# Altium PCB Control_Board_Model_C201_FFC_Sens_Conn.PcbDoc (part 5 of 12)
Units mil, origin at the board's own origin, x right, y up, seen from the top; angles counter-clockwise.
Board outline 3937.01 x 2755.91 mil, 6 copper layers (1-SIG-TOP, 2-GND, 3-PWR, 4-SIG-HOR, 5-SIG-VERT, 6-GND-BOT), stack 46.063 mil thick; 497 components, 379 nets, 1804 pads, 1610 vias.
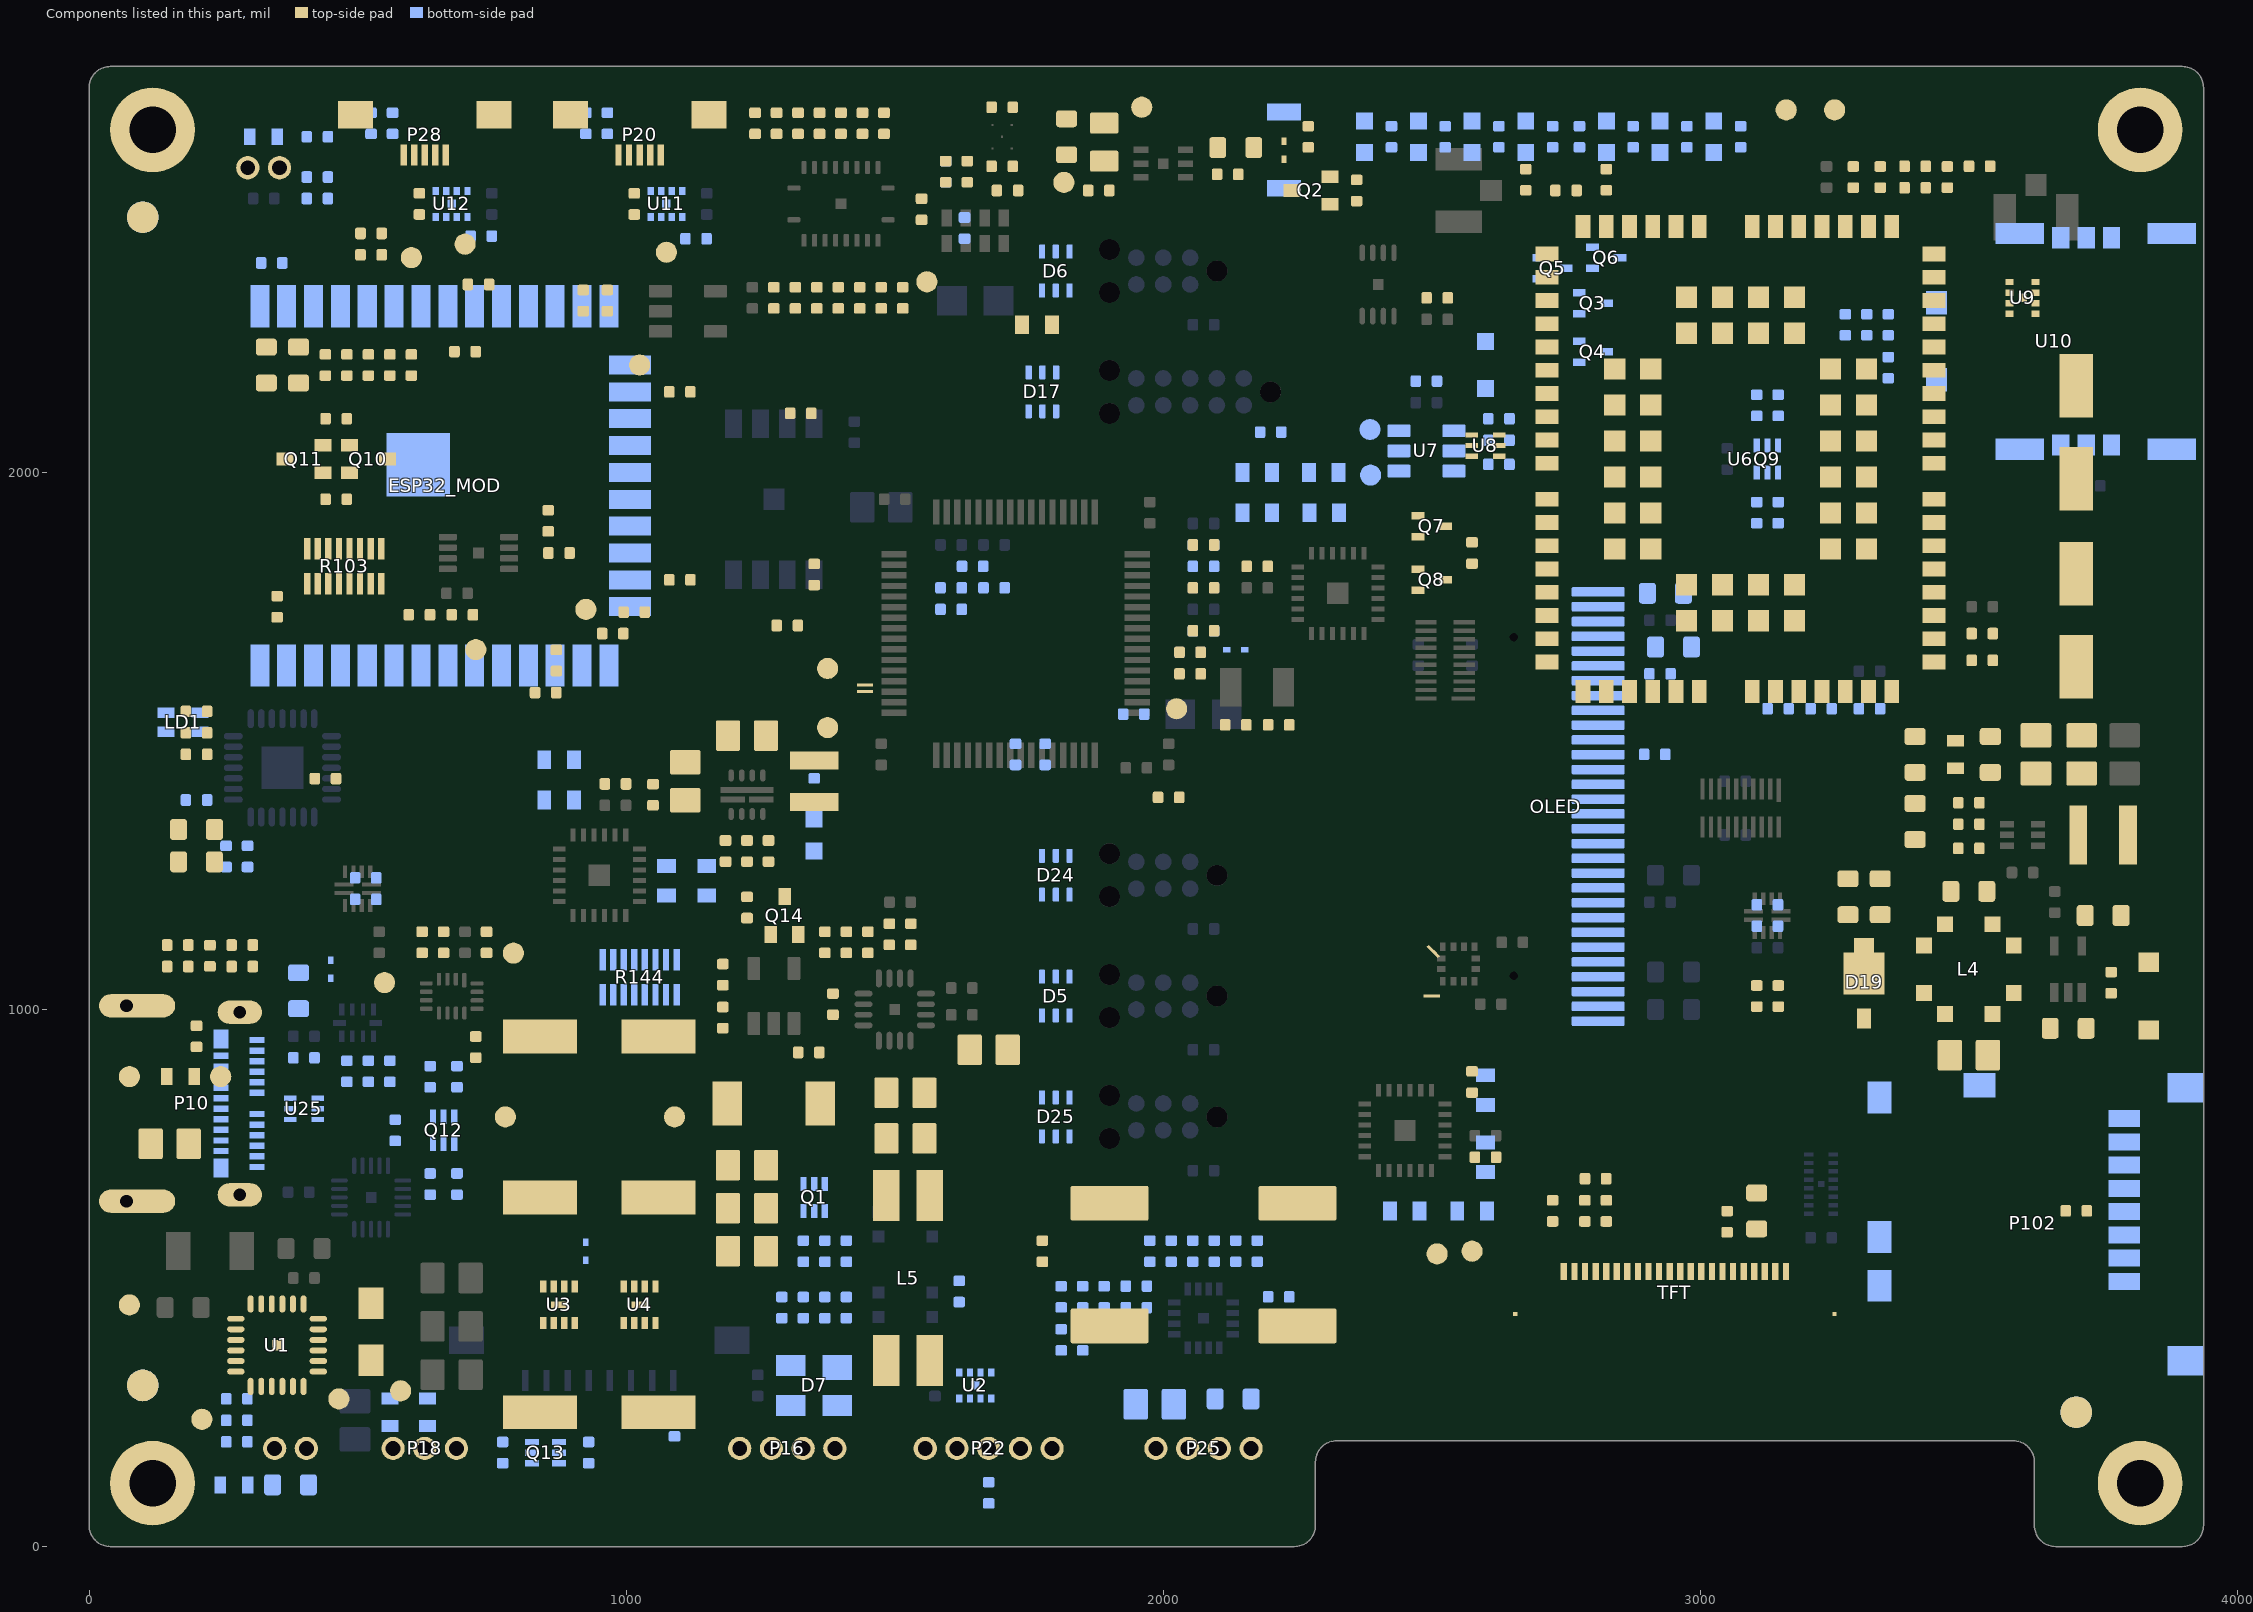
[diagram p7: the components of this part, seen from the top]

## Part data (continued)
D13: "Red 631nm LED Indication - Discrete 2V 0603 (1608 Metric)", Case/Package=0603, Case Code (Metric)=1608, Color=Red, Forward Current=30mA, Forward Voltage=2V, Lens Color=Colorless, Manufacturer="Vishay Lite-On", Manufacturer Part Number=LTST-C191KRKT, Max Operating Temperature=85°C, Min Operating Temperature=-55°C, Package Quantity=1, Power Dissipation=75mW, Reverse Voltage=5V, Supplier Part Number 1=160-1447-1-ND, Test Current=20mA, Case Code (Imperial)=0603, ComponentLink1Description=http://optoelectronics.liteon.com/upload/download/DS22-2000-223/LTST-C191KRKT.PDF?src-supplier=Digi-Key, ComponentLink1URL=http://optoelectronics.liteon.com/upload/download/DS22-2000-223/LTST-C191KRKT.PDF?src-supplier=Digi-Key, ComponentLink2Description=http://www1.futureelectronics.com/doc/LITE-ON/LTST-C191KRKT.pdf?src-supplier=Future+Electronics, ComponentLink2URL=http://www1.futureelectronics.com/doc/LITE-ON/LTST-C191KRKT.pdf?src-supplier=Future+Electronics, ComponentLink3Description=https://www.verical.com/server-webapp/html/getDatasheet?partID=141922&src-supplier=Verical, ComponentLink3URL=https://www.verical.com/server-webapp/html/getDatasheet?partID=141922&src-supplier=Verical, ComponentLink4Description=http://www.mouser.com/ds/2/239/LTST-C191KRKT-1140668.pdf?src-supplier=Mouser, ComponentLink4URL=http://www.mouser.com/ds/2/239/LTST-C191KRKT-1140668.pdf?src-supplier=Mouser, Depth=0.8mm, Dominant Wavelength=631nm, Height=0.55mm, Illumination Color=Red, Lead Free="Lead Free", Length=1.6mm, Lens Style=Clear,Diffused,Colorless,Rectangular, Lens Transparency=Clear, Luminous Intensity=54mcd, Mount="Surface Mount", Number of Elements=1, Number of LEDs=1, Number of Pins=2, Packaging="Tape and Reel", Power Rating=75mW, Pricing 1="1=0.26, 10=0.192, 100=0.0909, 500=0.0606, 1000=0.0475, 2500=0.0465 (USD)", Radiation Hardening=No, Stock 1=230321, Supplier 1=Digi-Key, Viewing Angle=130°, Voltage=2V, Wavelength=639nm, Width=0.8mm
D14: "Green 571nm LED Indication - Discrete 2V 0603 (1608 Metric)", Case Code (Imperial)=0603, Case Code (Metric)=1608, Forward Current=30mA, Forward Voltage=2V, Illumination Color=Green, Lens Color=Colorless, Manufacturer="Vishay Lite-On", Manufacturer Part Number=LTST-C191KGKT, Max Operating Temperature=85°C, Max Power Dissipation=75mW, Min Operating Temperature=-55°C, Package Quantity=1, Reverse Voltage=5V, Supplier Part Number 1=160-1446-6-ND, Test Current=20mA, ComponentLink1Description=http://optoelectronics.liteon.com/upload/download/DS22-2000-228/LTST-C191KGKT.PDF?src-supplier=Digi-Key, ComponentLink1URL=http://optoelectronics.liteon.com/upload/download/DS22-2000-228/LTST-C191KGKT.PDF?src-supplier=Digi-Key, Depth=0.8mm, Dominant Wavelength=571nm, Height=0.55mm, Lead Free="Lead Free", Length=1.6mm, Lens Style=Rectangular,Colorless, Lens Transparency=Clear, Luminous Intensity=35mcd, Mount="Surface Mount", Number of Elements=1, Number of LEDs=1, Number of Pins=2, Packaging="Tape and Reel", Power Dissipation=75mW, Power Rating=75mW, Pricing 1="1=0.28, 10=0.201, 100=0.0954, 500=0.0636, 1000=0.0498, 2500=0.0488 (USD)", Radiation Hardening=No, Stock 1=788359, Supplier 1=Digi-Key, Viewing Angle=130°, Wavelength=574nm, Width=0.8mm
D15: "Blue 470nm LED Indication - Discrete 3.3V 0603 (1608 Metric)", Case/Package=0603, Case Code (Metric)=1608, Color=Blue, Forward Current=20mA, Forward Voltage=3.8V, Lens Color=Colorless, Manufacturer="Vishay Lite-On", Manufacturer Part Number=LTST-C191TBKT, Max Operating Temperature=80°C, Max Power Dissipation=75mW, Min Operating Temperature=-20°C, Package Quantity=1, Power Dissipation=76mW, Reverse Voltage=5V, Supplier Part Number 1=160-1647-1-ND, Case Code (Imperial)=0603, ComponentLink1Description=http://optoelectronics.liteon.com/upload/download/DS22-2000-230/LTST-C191TBKT.pdf?src-supplier=Digi-Key, ComponentLink1URL=http://optoelectronics.liteon.com/upload/download/DS22-2000-230/LTST-C191TBKT.pdf?src-supplier=Digi-Key, ComponentLink2Description=http://optoelectronics.liteon.com/upload/download/DS22-2000-230/LTST-C191TBKT.pdf?src-supplier=Verical, ComponentLink2URL=http://optoelectronics.liteon.com/upload/download/DS22-2000-230/LTST-C191TBKT.pdf?src-supplier=Verical, ComponentLink3Description=http://optoelectronics.liteon.com/upload/download/DS22-2000-230/LTST-C191TBKT.pdf?src-supplier=Mouser, ComponentLink3URL=http://optoelectronics.liteon.com/upload/download/DS22-2000-230/LTST-C191TBKT.pdf?src-supplier=Mouser, ComponentLink4Description=http://www1.futureelectronics.com/doc/LITE-ON/LTST-C191TBKT.pdf?src-supplier=Future+Electronics, ComponentLink4URL=http://www1.futureelectronics.com/doc/LITE-ON/LTST-C191TBKT.pdf?src-supplier=Future+Electronics, ComponentLink5Description=http://optoelectronics.liteon.com/upload/download/DS22-2000-230/LTST-C191TBKT.pdf?src-supplier=Jameco, ComponentLink5URL=http://optoelectronics.liteon.com/upload/download/DS22-2000-230/LTST-C191TBKT.pdf?src-supplier=Jameco, ComponentLink6Description=http://uk.rs-online.com/webdocs/0dc0/0900766b80dc02b4.pdf?src-supplier=RSComponents, ComponentLink6URL=http://uk.rs-online.com/webdocs/0dc0/0900766b80dc02b4.pdf?src-supplier=RSComponents, ComponentLink7Description=http://datasheet.iiic.cc/lite-on/LTST-C191TBKT.pdf?src-supplier=IIIC, ComponentLink7URL=http://datasheet.iiic.cc/lite-on/LTST-C191TBKT.pdf?src-supplier=IIIC, Depth=1.6mm, Dominant Wavelength=475nm, Height=0.55mm, Illumination Color=Blue, Lead Free="Lead Free", Length=0.8mm, Lens Style=Diffused,Colorless,Clear,Rectangular, Lens Transparency=Clear, Luminous Intensity=180mcd, Mount="Surface Mount", Number of Elements=1, Number of LEDs=1, Number of Pins=2, Packaging="Tape and Reel", Pricing 1="1=0.48, 10=0.342, 100=0.152, 500=0.1064, 1000=0.0874, 2500=0.076 (USD)", Radiation Hardening=No, Stock 1=239244, Supplier 1=Digi-Key, Test Current=20mA, Viewing Angle=130°, Wavelength=468nm, Width=0.8mm
D19: library part "DIODE SCHOTTKY 20V 1A STMITEFLAT", "Diode Schottky 20V 1A Surface Mount STmite Flat", Average Rectified Current=1A, Forward Voltage=440mV, Manufacturer=STMicroelectronics, Max Operating Temperature=150°C, Max Repetitive Reverse Voltage (Vrrm)=20V, Max Reverse Leakage Current=300uA, Max Surge Current=50A, Min Operating Temperature=-65°C, Package Quantity=1, Peak Reverse Current=3.9uA, Supplier Part Number 1=497-12281-1-ND, ComponentLink1Description=http://www.st.com/web/en/resource/technical/document/datasheet/CD00198749.pdf?src-supplier=Future+Electronics, ComponentLink1URL=http://www.st.com/web/en/resource/technical/document/datasheet/CD00198749.pdf?src-supplier=Future+Electronics, ComponentLink2Description=http://www.st.com/content/ccc/resource/technical/document/datasheet/b2/7e/6d/c8/81/31/4e/f2/CD00198749.pdf/files/CD00198749.pdf/jcr:content/translations/en.CD00198749.pdf?src-supplier=Digi-Key, ComponentLink2URL=http://www.st.com/content/ccc/resource/technical/document/datasheet/b2/7e/6d/c8/81/31/4e/f2/CD00198749.pdf/files/CD00198749.pdf/jcr:content/translations/en.CD00198749.pdf?src-supplier=Digi-Key, ComponentLink3Description=http://www.st.com/st-web-ui/static/active/en/resource/technical/document/datasheet/CD00198749.pdf?src-supplier=Mouser, ComponentLink3URL=http://www.st.com/st-web-ui/static/active/en/resource/technical/document/datasheet/CD00198749.pdf?src-supplier=Mouser, Element Configuration=Single, Forward Current=1A, Lead Free="Lead Free", Manufacturer Part Number=STPS120MF, Max Reverse Voltage (DC)=20V, Mount="Surface Mount", Number of Pins=2, Packaging="Tape and Reel", Peak Non-Repetitive Surge Current=50A, Pricing 1="1=0.48, 10=0.409, 100=0.3057, 500=0.2402, 1000=0.1856, 2500=0.1692, 5000=0.1583 (USD)", Radiation Hardening=No, Stock 1=3984, Supplier 1=Digi-Key
D20: library part "DIODE ZENER 3.3V 500MW SOD123", "Zener Diode ±5% Surface Mount SOD-123", Case/Package=SOD-123-2, Forward Voltage=900mV, Manufacturer=Diodes, Max Operating Temperature=150°C, Max Power Dissipation=500mW, Max Reverse Current=25uA, Min Operating Temperature=-65°C, Package Quantity=3000, Supplier Part Number 1=MMSZ5226B-FDICT-ND, Test Current=20mA, Tolerance=5%, Voltage Rating (DC)=3.3V, ComponentLink1Description=http://www.diodes.com/datasheets/ds18010.pdf?src-supplier=Avnet+Europe, ComponentLink1URL=http://www.diodes.com/datasheets/ds18010.pdf?src-supplier=Avnet+Europe, Element Configuration=Single, Height=1.35mm, Impedance=28R, Lead Free="Lead Free", Length=3.85mm, Manufacturer Part Number=MMSZ5226B-7-F, Max Reverse Leakage Current=25uA, Mount="Surface Mount", Number of Pins=2, Packaging="Tape and Reel", Power Dissipation=500mW, Power Rating=500mW, Pricing 1="1=0.19, 10=0.164, 100=0.063, 500=0.046, 1000=0.0309 (USD)", Radiation Hardening=No, Stock 1=63613, Supplier 1=Digi-Key, Termination=SMD/SMT, Voltage Tolerance=5%, Weight=0.000353oz, Width=1.7mm, Working Voltage=3.3V, Zener Current=25uA, Zener Voltage=3.3V
D21: library part "TVS DIODE ESDA25P35-1U1M 22V 41V 1610", "41V Clamp 35A (8/20µs) Ipp Tvs Diode Surface Mount 1610", Case/Package=1610, Clamping Voltage=41V, Manufacturer=STMicroelectronics, Max Operating Temperature=150°C, Min Breakdown Voltage=23.3V, Min Operating Temperature=-55°C, Peak Pulse Current=35A, Peak Pulse Power=1.4kW, Power Line Protection=No, Reverse Standoff Voltage=22V, Supplier Part Number 1=497-16913-1-ND, ComponentLink1Description=http://www.st.com/content/ccc/resource/technical/document/datasheet/group3/e4/43/53/b9/4e/8a/40/bb/DM00312034/files/DM00312034.pdf/jcr:content/translations/en.DM00312034.pdf?src-supplier=Digi-Key, ComponentLink1URL=http://www.st.com/content/ccc/resource/technical/document/datasheet/group3/e4/43/53/b9/4e/8a/40/bb/DM00312034/files/DM00312034.pdf/jcr:content/translations/en.DM00312034.pdf?src-supplier=Digi-Key, ComponentLink2Description=http://www.farnell.com/datasheets/2236209.pdf?src-supplier=Farnell, ComponentLink2URL=http://www.farnell.com/datasheets/2236209.pdf?src-supplier=Farnell, ComponentLink3Description=http://www.farnell.com/datasheets/2236209.pdf?src-supplier=Element14, ComponentLink3URL=http://www.farnell.com/datasheets/2236209.pdf?src-supplier=Element14, ComponentLink4Description=http://www.farnell.com/datasheets/2236209.pdf?src-supplier=Newark, ComponentLink4URL=http://www.farnell.com/datasheets/2236209.pdf?src-supplier=Newark, Composition=Zener, Manufacturer Part Number=ESDA25P35-1U1M, Mount="Surface Mount", Number of Pins=2, Number of Unidirectional Channels=1, Packaging="Tape and Reel", Pricing 1="1=0.45, 10=0.362, 25=0.3312, 100=0.2079, 250=0.2056, 500=0.1925, 1000=0.1309, 2500=0.1255 (USD)", Stock 1=12413, Supplier 1=Digi-Key
D23: library part "DIODE SCHOTTKY 40V 5A SOD128", "Diode Schottky 40V 5A Surface Mount CFP5", If - Forward Current="5 A", Ifsm - Forward Surge Current="70 A", Ir - Reverse Current="300 uA", Manufacturer=Nexperia, Maximum Operating Temperature="+ 150 C", Minimum Operating Temperature="- 55 C", Package / Case=SOD-128-2, Supplier Part Number 1=771-PMEG4050EP115, Vf - Forward Voltage="0.49 V", Vrrm - Repetitive Reverse Voltage="40 V", Brand=Nexperia, Category="Schottky Diodes & Rectifiers", ComponentLink1Description=https://www.mouser.com/datasheet/2/916/PMEG4050EP-1320387.pdf, ComponentLink1URL=https://www.mouser.com/datasheet/2/916/PMEG4050EP-1320387.pdf, Configuration=Single, Height="1.1 mm", Length="4 mm", Manufacturer Part Number=PMEG4050EP,115, Minimum Order Quantity=1, Mount="Surface Mount", Mounting Style=SMD/SMT, Operating Temperature Range="+ 150 C", Packaging="Cut Tape", Pricing 1="1=0.470, 10=0.346, 100=0.216, 1000=0.147, 3000=0.129, 9000=0.116, 24000=0.114, 45000=0.107, 99000=0.104 (USD)", Product="Schottky Diodes", Product Type="Schottky Diodes & Rectifiers", Qualification=AEC-Q101, Reeling=True, RoHS="RoHS Compliant", RoHS - Mouser=Y, Standard Pack Qty=3000, Stock 1=39277, Subcategory="Diodes & Rectifiers", Supplier 1=Mouser, Technology=Si, Type="Schottky Diode", Width="2.7 mm"
ESP32_MOD: library part "MOD ESP32-WROOM-32D TRACE ANT SMD", "Bluetooth, WiFi 802.11b/g/n, Bluetooth v4.2 + EDR, Class 1, 2 and 3 Transceiver Module 2.4GHz ~ 2.5GHz Integrated, Trace Surface Mount", Case/Package=SMD/SMT, Frequency=2.5GHz, Manufacturer="Espressif Systems", Max Operating Temperature=85°C, Min Operating Temperature=-40°C, Supplier Part Number 1=1904-1023-1-ND, ComponentLink1Description=https://www.espressif.com/sites/default/files/documentation/esp32-wroom-32d_esp32-wroom-32u_datasheet_en.pdf?src-supplier=Digi-Key, ComponentLink1URL=https://www.espressif.com/sites/default/files/documentation/esp32-wroom-32d_esp32-wroom-32u_datasheet_en.pdf?src-supplier=Digi-Key, Data Rate=150Mbps, Interface=I2C,SPI,GPIO,PWM,SDIO,UART, Manufacturer Part Number=ESP32-WROOM-32D, Memory Size=536KB, Mount="Surface Mount", Packaging="Cut Tape", Pricing 1="1=3.8 (USD)", Sensitivity=-98dBm, Stock 1=11163, Supplier 1=Digi-Key
FB1: library part "FERRITE BEAD 30 OHM 0603 1LN", "30 Ohms @ 100MHz 1 Power Line Ferrite Bead 0603 (1608 Metric) 5A 10mOhm", Case/Package=0603, Case Code (Metric)=1608, Current Rating=5A, DC Resistance (DCR)=10mR, Manufacturer=TDK, Manufacturer Part Number=MPZ1608S300ATAH0, Max Operating Temperature=125°C, Min Operating Temperature=-55°C, Package Quantity=4000, Supplier Part Number 1=445-1562-6-ND, Test Frequency=100MHz, Tolerance=25%, Case Code (Imperial)=0603, ComponentLink1Description=https://media.digikey.com/pdf/Data%20Sheets/TDK%20PDFs/MPZ_Series_Br.pdf?src-supplier=Digi-Key, ComponentLink1URL=https://media.digikey.com/pdf/Data%20Sheets/TDK%20PDFs/MPZ_Series_Br.pdf?src-supplier=Digi-Key, ComponentLink2Description=http://www.farnell.com/datasheets/1795297.pdf?src-supplier=Element14, ComponentLink2URL=http://www.farnell.com/datasheets/1795297.pdf?src-supplier=Element14, Core Material=Ferrite, Depth=0.8mm, Height=0.6mm, Impedance=30R, Lead Free="Lead Free", Length=0.063inch, Max DC Current=5A, Mount="Surface Mount", Packaging="Tape and Reel", Pricing 1="1=0.1, 10=0.079, 25=0.0716, 50=0.0644, 100=0.0472, 250=0.0343, 500=0.0315, 1000=0.0272 (USD)", REACH SVHC="No SVHC", Revision="July-2002: Re-released for DXP Platform.", Stock 1=93167, Supplier 1=Digi-Key, Termination=SMD/SMT, Weight=7.1E-05oz, Width=0.031inch
FB2 FB3: library part "FERRITE BEAD 30 OHM 0603 1LN", "30 Ohms @ 100MHz 1 Power Line Ferrite Bead 0603 (1608 Metric) 5A 10mOhm", Case/Package=0603, Case Code (Metric)=1608, Current Rating=5A, DC Resistance (DCR)=10mR, Manufacturer=TDK, Max Operating Temperature=125°C, Min Operating Temperature=-55°C, Package Quantity=4000, Supplier Part Number 1=445-1562-6-ND, Test Frequency=100MHz, Tolerance=25%, Case Code (Imperial)=0603, ClassName=P109, ComponentLink1Description=https://media.digikey.com/pdf/Data%20Sheets/TDK%20PDFs/MPZ_Series_Br.pdf?src-supplier=Digi-Key, ComponentLink1URL=https://media.digikey.com/pdf/Data%20Sheets/TDK%20PDFs/MPZ_Series_Br.pdf?src-supplier=Digi-Key, ComponentLink2Description=http://www.farnell.com/datasheets/1795297.pdf?src-supplier=Element14, ComponentLink2URL=http://www.farnell.com/datasheets/1795297.pdf?src-supplier=Element14, Core Material=Ferrite, Depth=0.8mm, Height=0.6mm, Impedance=30R, Lead Free="Lead Free", Length=0.063inch, Manufacturer Part Number=MPZ1608S300ATAH0, Max DC Current=5A, Mount="Surface Mount", Packaging="Tape and Reel", Pricing 1="1=0.1, 10=0.079, 25=0.0716, 50=0.0644, 100=0.0472, 250=0.0343, 500=0.0315, 1000=0.0272 (USD)", REACH SVHC="No SVHC", Revision="July-2002: Re-released for DXP Platform.", Stock 1=93167, Supplier 1=Digi-Key, Termination=SMD/SMT, Weight=7.1E-05oz, Width=0.031inch
FB4: "470 Ohms @ 100MHz 1  Ferrite Bead 0603 (1608 Metric) 500mA 210mOhm", Case/Package=0603, Case Code (Metric)=1608, Current Rating=500mA, DC Resistance (DCR)=210mR, Frequency=100MHz, Manufacturer=Murata, Manufacturer Part Number=BLM18EG471SN1D, Max Operating Temperature=125°C, Min Operating Temperature=-55°C, Package Quantity=1, Supplier Part Number 1=490-3993-6-ND, Tolerance=25%, Case Code (Imperial)=0603, ComponentLink1Description=http://uk.rs-online.com/webdocs/11b5/0900766b811b5866.pdf?src-supplier=RSComponents, ComponentLink1URL=http://uk.rs-online.com/webdocs/11b5/0900766b811b5866.pdf?src-supplier=RSComponents, ComponentLink2Description=http://www.farnell.com/datasheets/5169.pdf?src-supplier=Element14, ComponentLink2URL=http://www.farnell.com/datasheets/5169.pdf?src-supplier=Element14, ComponentLink3Description=https://www.murata.com/en-global/products/productdata/8796733767710/S0580E.pdf?src-supplier=Digi-Key, ComponentLink3URL=https://www.murata.com/en-global/products/productdata/8796733767710/S0580E.pdf?src-supplier=Digi-Key, ComponentLink4Description=https://www.distrelec.biz/Web/Downloads/_t/ds/blm-series_eng_tds.pdf?mime=application%2Fpdf&src-supplier=Distrelec, ComponentLink4URL=https://www.distrelec.biz/Web/Downloads/_t/ds/blm-series_eng_tds.pdf?mime=application%2Fpdf&src-supplier=Distrelec, ComponentLink5Description=https://www.verical.com/server-webapp/html/getDatasheet?partID=228865&src-supplier=Verical, ComponentLink5URL=https://www.verical.com/server-webapp/html/getDatasheet?partID=228865&src-supplier=Verical, ComponentLink6Description=http://search.murata.co.jp/Ceramy/image/img/PDF/ENG/L0110S0101BLM18E.pdf?src-supplier=Avnet, ComponentLink6URL=http://search.murata.co.jp/Ceramy/image/img/PDF/ENG/L0110S0101BLM18E.pdf?src-supplier=Avnet, ComponentLink7Description=http://www.produktinfo.conrad.com/datenblaetter/1100000-1199999/001171700-da-01-en-CHIP_DROSSEL0603_470R_500MA_1_6X0_8MM.pdf?src-supplier=Conrad, ComponentLink7URL=http://www.produktinfo.conrad.com/datenblaetter/1100000-1199999/001171700-da-01-en-CHIP_DROSSEL0603_470R_500MA_1_6X0_8MM.pdf?src-supplier=Conrad, ComponentLink8Description=http://www.produktinfo.conrad.com/datenblaetter/1100000-1199999/001172269-da-01-en-DROSSEL_0603_470R_1_6X0_8MM_4000ST.pdf?src-supplier=Conrad, ComponentLink8URL=http://www.produktinfo.conrad.com/datenblaetter/1100000-1199999/001172269-da-01-en-DROSSEL_0603_470R_1_6X0_8MM_4000ST.pdf?src-supplier=Conrad, Core Material=Ferrite, DC Current=500mA, Depth=0.8mm, Height=0.8mm, Impedance="470 Ohm", Lead Free="Lead Free", Length=1.6mm, Material=Ferrite,Steel, Max Current Rating=500mA, Max DC Current=500mA, Military Standard=Not, Mount="Surface Mount", Number of Circuits=1, Number of Lines=1, Number of Pins=2, Packaging="Tape and Reel", Pricing 1="1=0.23, 10=0.175, 25=0.1452, 50=0.1252, 100=0.1126, 250=0.0951, 500=0.0851, 1000=0.0726 (USD)", Radiation Hardening=No, REACH SVHC="No SVHC", Resistance=210mR, Stock 1=4285, Supplier 1=Digi-Key, Termination=SMD/SMT, Test Frequency=100MHz, Weight=7.1E-05oz, Width=0.8mm
FB5 FB6: "1 kOhms @ 100MHz 1  Ferrite Bead 0402 (1005 Metric) 350mA 490mOhm", Case/Package=0402, Case Code (Metric)=1005, Current Rating=350mA, DC Resistance (DCR)=490mR, Manufacturer=Murata, Manufacturer Part Number=BLM15AX102SN1D, Max Operating Temperature=125°C, Min Operating Temperature=-55°C, Package Quantity=1, Supplier Part Number 1=490-5442-1-ND, Test Frequency=100MHz, Tolerance=25%, Case Code (Imperial)=0402, ComponentLink1Description=https://www.murata.com/en-us/products/productdata/8796740059166/ENFA0018.pdf?src-supplier=Digi-Key, ComponentLink1URL=https://www.murata.com/en-us/products/productdata/8796740059166/ENFA0018.pdf?src-supplier=Digi-Key, ComponentLink2Description=http://search.murata.co.jp/Ceramy/image/img/PDF/ENG/L0110S0100BLM15AX_SN.pdf?src-supplier=Future+Electronics, ComponentLink2URL=http://search.murata.co.jp/Ceramy/image/img/PDF/ENG/L0110S0100BLM15AX_SN.pdf?src-supplier=Future+Electronics, ComponentLink3Description=http://www.produktinfo.conrad.com/datenblaetter/1100000-1199999/001171674-da-01-en-CHIP_DROSSEL0402_1000R_350MA_1_0X0_5MM.pdf?src-supplier=Conrad, ComponentLink3URL=http://www.produktinfo.conrad.com/datenblaetter/1100000-1199999/001171674-da-01-en-CHIP_DROSSEL0402_1000R_350MA_1_0X0_5MM.pdf?src-supplier=Conrad, ComponentLink4Description=http://www.produktinfo.conrad.com/datenblaetter/1100000-1199999/001172166-da-01-en-DROSSEL_0402_1000R_31_0X0_5MM_10000ST.pdf?src-supplier=Conrad, ComponentLink4URL=http://www.produktinfo.conrad.com/datenblaetter/1100000-1199999/001172166-da-01-en-DROSSEL_0402_1000R_31_0X0_5MM_10000ST.pdf?src-supplier=Conrad, Depth=0.5mm, Height=0.5mm, Impedance=1kR, Lead Free="Lead Free", Length=1mm, Material=Ferrite,Steel, Max Current Rating=350mA, Max DC Current=350mA, Mount="Surface Mount", Number of Circuits=1, Number of Lines=1, Number of Pins=2, Packaging="Tape and Reel", Pricing 1="1=0.11, 10=0.09, 25=0.0812, 50=0.0596, 100=0.0514, 250=0.0406, 500=0.0343, 1000=0.0289, 5000=0.0257 (USD)", REACH SVHC="No SVHC", Stock 1=138597, Supplier 1=Digi-Key, Termination=SMD/SMT, Width=0.5mm
FID1 FID2 FID3: library part Fiducial, "Fiducial mark.  There is nothing to buy or mount.", ClassName=FiducialMark, CompType=Fiducial, Manufacturer=N/A, Manufacturer Part Number=N/A, MountType=N/A, PackageReference=Fiducial
J1 J2 J4 J7 J8 J10 J13: "NO PCB Bridge (May be closed by a solder blob)"
  J2 J4: ClassName=16xIO_1
  J7 J8: ClassName=16xIO_2
  J10 J13: ClassName=16xIO_3
J3 J5 J6 J9 J11 J12: "NC PCB Bridge (May be opened by cutting the copper trace)"
  J3 J5: ClassName=16xIO_1
  J6 J9: ClassName=16xIO_2
  J11 J12: ClassName=16xIO_3
L1: "1µH Shielded Molded Inductor 5A 24mOhm Max Nonstandard", Case/Package=1212, Case Code (Metric)=3630, Current Rating=5A, DC Resistance (DCR)=24mR, Inductance=1uH, Inductance Tolerance=20%, Manufacturer="Vishay Dale", Manufacturer Part Number=IHLP1212BZER1R0M11, Max Operating Temperature=125°C, Min Operating Temperature=-55°C, Package Quantity=3000, Saturation Current=4.5A, Self Resonant Frequency=75MHz, Supplier Part Number 1=541-1319-1-ND, Test Frequency=100kHz, Case Code (Imperial)=1212, ComponentLink1Description=http://www.mouser.com/ds/2/427/lp12bz11-244380.pdf?src-supplier=Mouser, ComponentLink1URL=http://www.mouser.com/ds/2/427/lp12bz11-244380.pdf?src-supplier=Mouser, ComponentLink2Description=http://www.vishay.com/docs/34289/lp12bz11.pdf?src-supplier=Digi-Key, ComponentLink2URL=http://www.vishay.com/docs/34289/lp12bz11.pdf?src-supplier=Digi-Key, ComponentLink3Description=http://www.vishay.com/docs/34289/lp12bz11.pdf?src-supplier=Avnet, ComponentLink3URL=http://www.vishay.com/docs/34289/lp12bz11.pdf?src-supplier=Avnet, ComponentLink4Description=http://www.farnell.com/datasheets/652599.pdf?src-supplier=Element14, ComponentLink4URL=http://www.farnell.com/datasheets/652599.pdf?src-supplier=Element14, ComponentLink5Description=http://www.vishay.com/docs/34289/lp12bz11.pdf?src-supplier=Avnet+Europe, ComponentLink5URL=http://www.vishay.com/docs/34289/lp12bz11.pdf?src-supplier=Avnet+Europe, ComponentLink6Description=https://www.verical.com/server-webapp/html/getDatasheet?partID=180380&src-supplier=Verical, ComponentLink6URL=https://www.verical.com/server-webapp/html/getDatasheet?partID=180380&src-supplier=Verical, Contact Plating=Tin, Core Material=Metal,Composite, Depth=3.2mm, Height=2mm, Height - Seated (Max)=0.079inch, Lead Free="Lead Free", Length=3.6mm, Max DC Current=5A, Military Standard=Not, Mount="Surface Mount", Number of Pins=2, Packaging="Tape and Reel", Pricing 1="1=1.39, 10=1.287, 25=1.188, 50=0.99, 100=0.9306, 250=0.8316, 500=0.7128, 1000=0.6336 (USD)", Radiation Hardening=No, REACH SVHC=Unknown, RMS Current (Irms)=5A, Shielding=Shielded, Stock 1=70286, Supplier 1=Digi-Key, Termination=SMD/SMT, Tolerance=20%, Width=0.118inch
L2: "1µH Semi-Shielded Wirewound Inductor 2.4A 54mOhm Max Nonstandard", Inductance="1 uH", Manufacturer="Wurth Elektronik", Manufacturer Part Number=74405031010, Maximum DC Current="2.4 A", Maximum DC Resistance="54 mOhms", Maximum Operating Temperature="+ 125 C", Minimum Operating Temperature="- 40 C", Package / Case="3 mm x 3 mm", Saturation Current="5.4 A", Self Resonant Frequency="66 MHz", Supplier Part Number 1=710-74405031010, Test Frequency="1 MHz", Tolerance="20 %", Application=Power, Brand="Wurth Elektronik", Category="Fixed Inductors", ComponentLink1Description=https://www.mouser.com/datasheet/2/445/74405031010-1720907.pdf, ComponentLink1URL=https://www.mouser.com/datasheet/2/445/74405031010-1720907.pdf, Height="1.2 mm", Length="3 mm", Minimum Order Quantity=1, Mount="Surface Mount", Mounting Style="PCB Mount", Packaging="Cut Tape", Pricing 1="1=0.730, 10=0.721, 50=0.601, 100=0.457, 1000=0.397, 2000=0.385 (USD)", Product="Fixed Inductors", Product Type="Fixed Inductors", Reeling=True, RoHS="RoHS Compliant", RoHS - Mouser=Y, Series=WE-LQSH, Shielding=Shielded, Standard Pack Qty=2000, Stock 1=2000, Subcategory="Inductors, Chokes & Coils", Supplier 1=Mouser, Supplier 2=Digi-Key, Supplier Part Number 2=732-10780-1-ND, Termination=-, Termination Style=SMD/SMT, Width="3 mm"
L3: "1µH Shielded Molded Inductor 2.5A 75mOhm Max 1008 (2520 Metric)", Case Code - in=1008, Case Code - mm=2520, Inductance="1 uH", Manufacturer="Wurth Elektronik", Manufacturer Part Number=74438323010, Maximum DC Current="2.5 A", Maximum DC Resistance="75 mOhms", Maximum Operating Temperature="+ 125 C", Minimum Operating Temperature="- 40 C", Package / Case="1008 (2520 metric)", Self Resonant Frequency="80 MHz", Supplier Part Number 1=710-74438323010, Test Frequency="100 kHz", Tolerance="20 %", Application=Power, Brand="Wurth Elektronik", Category="Fixed Inductors", ComponentLink1Description=https://www.mouser.com/datasheet/2/445/74438323010-1721873.pdf, ComponentLink1URL=https://www.mouser.com/datasheet/2/445/74438323010-1721873.pdf, Height="1 mm", Length="2.5 mm", Minimum Order Quantity=1, Mount="Surface Mount", Mounting Style="PCB Mount", Packaging="Cut Tape", Pricing 1="1=1.13, 10=1.10, 50=1.03, 100=0.961, 500=0.887, 1000=0.813, 3000=0.739 (USD)", Product="Power Inductors", Product Type="Fixed Inductors", Reeling=True, RoHS="RoHS Compliant", RoHS - Mouser=Y, Series=WE-MAPI, Shielding=Shielded, Standard Pack Qty=3000, Stock 1=4771, Subcategory="Inductors, Chokes & Coils", Supplier 1=Mouser, Termination=-, Termination Style=SMD/SMT, Type="SMD Inductor", Width="2 mm"
L4: "6.8µH Shielded Coupled Inductors 1.2A 160mOhm Max 1919 (4.8x4.8 Metric)", Inductance="6.8 uH", Manufacturer=Coilcraft, Manufacturer Part Number=LPD5030-682MR, Maximum DC Current="1.2 A", Maximum DC Resistance="160 mOhms", Maximum Operating Temperature="+ 125 C", Minimum Operating Temperature="- 40 C", Self Resonant Frequency="40 MHz", Test Frequency="100 kHz", Tolerance="30 %", Application=Power, Brand=Coilcraft, Category="Fixed Coupled Inductors", ComponentLink1Description=https://www.coilcraft.com/en-us/products/power/coupled-inductors/1-1-shielded-coupled/msd_h/msd1048h/#, ComponentLink1URL=https://www.coilcraft.com/getmedia/492eebb2-11bb-49ba-b07b-44c830c73f93/msd1048h.pdf, Height="2.9 mm", Length="4.8 mm", Minimum Order Quantity=1, Mount="Surface Mount", Mounting Style="PCB Mount", Packaging="Cut Tape", Product="Power Inductors", Product Type="Fixed Coupled Inductors", Reeling=True, Series=LPD5030, Shielding=Shielded, Subcategory="Inductors, Chokes & Coils", Termination=-, Termination Style=SMD/SMT, Type="SMD Inductor", Width="4.8 mm"
L5: "2.2µH Shielded Coupled Inductors 3.2A 22mOhm Max 4040 (10.3x10.3 Metric)", Inductance="2.2 uH", Manufacturer=Coilcraft, Manufacturer Part Number=MSD1048H-222, Maximum DC Current="3.2 A", Maximum DC Resistance="22 mOhms", Maximum Operating Temperature="+ 125 C", Minimum Operating Temperature="- 40 C", Self Resonant Frequency="55 MHz", Test Frequency="100 kHz", Tolerance="30 %", Application=Power, Brand=Coilcraft, Category="Fixed Coupled Inductors", ComponentLink1Description=https://www.coilcraft.com/en-us/products/power/coupled-inductors/1-1-shielded-coupled/msd_h/msd1048h/#, ComponentLink1URL=https://www.coilcraft.com/getmedia/492eebb2-11bb-49ba-b07b-44c830c73f93/msd1048h.pdf, Height="4.8 mm", Length="10.3 mm", Minimum Order Quantity=1, Mount="Surface Mount", Mounting Style="PCB Mount", Packaging="Cut Tape", Product="Power Inductors", Product Type="Fixed Coupled Inductors", Reeling=True, Series=MSD1048H, Shielding=Shielded, Subcategory="Inductors, Chokes & Coils", Termination=-, Termination Style=SMD/SMT, Type="SMD Inductor", Width="10.3 mm"
LD1: library part "LED RGB DIFFUSED SMD", "Red, Green, Blue (RGB) 624nm Red, 525nm Green, 470nm Blue LED Indication - Discrete 2V Red, 3.3V Green, 3.3V Blue 0606 (1616 Metric)", Case/Package=0606, Case Code (Metric)=1616, Color=Blue,Green,Red, Forward Voltage=3.3V, Manufacturer="Wurth Electronics", Supplier Part Number 1=732-11390-1-ND, Test Current=20mA, Case Code (Imperial)=0606, ComponentLink1Description=https://katalog.we-online.de/led/datasheet/150066M153000.pdf?src-supplier=Digi-Key, ComponentLink1URL=https://katalog.we-online.de/led/datasheet/150066M153000.pdf?src-supplier=Digi-Key, ComponentLink2Description=http://www.farnell.com/datasheets/2301702.pdf?src-supplier=Farnell, ComponentLink2URL=http://www.farnell.com/datasheets/2301702.pdf?src-supplier=Farnell, ComponentLink3Description=http://www.farnell.com/datasheets/2301702.pdf?src-supplier=Newark, ComponentLink3URL=http://www.farnell.com/datasheets/2301702.pdf?src-supplier=Newark, ComponentLink4Description=http://www.farnell.com/datasheets/2301702.pdf?src-supplier=Element14, ComponentLink4URL=http://www.farnell.com/datasheets/2301702.pdf?src-supplier=Element14, Dominant Wavelength=470nm, Element Configuration="Common Anode", Height=0.5mm, Length=1.6mm, Lens Size=1.6mm, Lens Style=Flat, Lens Transparency=Diffused, Luminous Intensity=180mcd, Manufacturer Part Number=150066M153000, Mount="Surface Mount", Packaging="Tape and Reel", Pricing 1="1=0.51, 50=0.415, 100=0.298, 500=0.272 (USD)", Stock 1=7810, Supplier 1=Digi-Key, Viewing Angle=120°, Width=1.6mm
MNT1 MNT2 MNT3 MNT4: library part MountHole_M2, "PCB Mount Hole. There is nothing to buy or mount."
NT1 NT2 NT3 NT4: library part "Net Tie Line"
  NT1 NT2: ClassName=STM32G473CETx
  NT3 NT4: ClassName=P128
OLED: library part "MOD QG-2864KSWEG01 OLED DISPLAY", "OLED Display Module FPC #LT1306P22 TOP 30P 0.7MM", Manufacturer="Limito Technology Inc.", Max Operating Temperature=70°C, Min Operating Temperature=-40°C, Manufacturer Part Number=QG-2864KSWEG01, Mount="FPC Soldered on PCB", Number of Circuits=30, Number of Columns=128, Number of Contacts=30, Number of Rows=64, pin_1=GND, pin_2=C2P, pin_3=C2N, pin_4=C1P, pin_5=C1N, pin_6=VBAT, pin_7=NC, pin_8=VSS, pin_9=VDD, pin_10=BS0, pin_11=BS1, pin_12=BS2, pin_13=CS#, pin_14=RES#, pin_15=D/C#, pin_16=R/W#, pin_17=E/RD#, pin_18=D0, pin_19=D1, pin_20=D2, pin_21=D3, pin_22=D4, pin_23=D5, pin_24=D6, pin_25=D7, pin_26=IREF, pin_27=VCOMH, pin_28=VCC, pin_29=VSS, pin_30=GND, Pitch=0.7mm
P09: library part "LED YELLOW CLEAR 0603 SMD", "Yellow 591nm LED Indication - Discrete 2.1V 0603 (1608 Metric)", Case/Package=0603, Case Code (Metric)=1608, Color=Yellow, Forward Current=30mA, Forward Voltage=2.4V, Lens Color=Colorless, Manufacturer="Vishay Lite-On", Manufacturer Part Number=LTST-C191KSKT, Max Operating Temperature=85°C, Min Operating Temperature=-55°C, Package Quantity=1, Power Dissipation=75mW, Reverse Voltage=5V, Supplier Part Number 1=160-1448-1-ND, Test Current=20mA, Case Code (Imperial)=0603, ComponentLink1Description=http://optoelectronics.liteon.com/upload/download/DS22-2000-224/LTST-C191KSKT.PDF?src-supplier=Digi-Key, ComponentLink1URL=http://optoelectronics.liteon.com/upload/download/DS22-2000-224/LTST-C191KSKT.PDF?src-supplier=Digi-Key, ComponentLink2Description=https://www.verical.com/server-webapp/html/getDatasheet?partID=141495&src-supplier=Verical, ComponentLink2URL=https://www.verical.com/server-webapp/html/getDatasheet?partID=141495&src-supplier=Verical, ComponentLink3Description=http://www.mouser.com/ds/2/239/LTST-C191KSKT-1141271.pdf?src-supplier=Mouser, ComponentLink3URL=http://www.mouser.com/ds/2/239/LTST-C191KSKT-1141271.pdf?src-supplier=Mouser, ComponentLink4Description=http://www1.futureelectronics.com/doc/LITE%20ON/LITE-ON%20LTST-C191KSKT.pdf?src-supplier=Future+Electronics, ComponentLink4URL=http://www1.futureelectronics.com/doc/LITE%20ON/LITE-ON%20LTST-C191KSKT.pdf?src-supplier=Future+Electronics, Depth=0.8mm, Dominant Wavelength=597nm, Height=0.55mm, Illumination Color=Yellow, Lead Free="Lead Free", Length=1.6mm, Lens Style=Diffused,Colorless,Rectangular,Clear, Lens Transparency=Clear, Luminous Intensity=180mcd, Mount="Surface Mount", Number of Elements=1, Number of LEDs=1, Number of Pins=2, Packaging="Tape and Reel", Power Rating=75mW, Pricing 1="1=0.28, 10=0.204, 100=0.0968, 500=0.0645, 1000=0.0505, 2500=0.0495 (USD)", Radiation Hardening=No, Stock 1=614196, Supplier 1=Digi-Key, Viewing Angle=130°, Wavelength=588nm, Width=0.8mm
P10: library part "CONN 2012670005 RCP USB3.1 TYPEC 24P SMD RA", "USB-C (USB TYPE-C) USB 3.2 Gen 2 (USB 3.1 Gen 2, Superspeed + (USB 3.1)) Receptacle Connector 24 Position Surface Mount, Right Angle; Through Hole", Current Rating=5A, Flammability Rating="UL94 V-0", Insulation Color=Black, Manufacturer=Molex, Manufacturer Part Number=201267-0005, Max Operating Temperature=105°C, Min Operating Temperature=-40°C, Supplier Part Number 1=WM17992CT-ND, Voltage Rating=30V, ComponentLink1Description=https://www.molex.com/pdm_docs/sd/2012670005_sd.pdf?src-supplier=Digi-Key, ComponentLink1URL=https://www.molex.com/pdm_docs/sd/2012670005_sd.pdf?src-supplier=Digi-Key, ComponentLink2Description=http://www.farnell.com/datasheets/2722545.pdf?src-supplier=Element14, ComponentLink2URL=http://www.farnell.com/datasheets/2722545.pdf?src-supplier=Element14, ComponentLink3Description=http://www.farnell.com/datasheets/2722545.pdf?src-supplier=Newark, ComponentLink3URL=http://www.farnell.com/datasheets/2722545.pdf?src-supplier=Newark, ComponentLink4Description=https://www.molex.com/pdm_docs/pk/2012670005-PK1.pdf?src-supplier=Digi-Key, ComponentLink4URL=https://www.molex.com/pdm_docs/pk/2012670005-PK1.pdf?src-supplier=Digi-Key, ComponentLink5Description=http://www.farnell.com/datasheets/2722545.pdf?src-supplier=Farnell, ComponentLink5URL=http://www.farnell.com/datasheets/2722545.pdf?src-supplier=Farnell, Connector Type=USB, Contact Plating=Gold, Gender=Receptacle, Mating Cycles=20000, Mount="Surface Mount,Through Hole", Number of Contacts=24, Number of Ports=1, Packaging="Tape and Reel", Pricing 1="1=2.34, 10=1.997, 100=1.6496 (USD)", Shielding=Shielded, Stock 1=2580, Supplier 1=Digi-Key, Termination=Solder
P15: library part "LED BLUE CLEAR 0603 SMD", "Blue 470nm LED Indication - Discrete 3.3V 0603 (1608 Metric)", Case/Package=0603, Case Code (Metric)=1608, Color=Blue, Forward Current=20mA, Forward Voltage=3.8V, Lens Color=Colorless, Manufacturer="Vishay Lite-On", Manufacturer Part Number=LTST-C191TBKT, Max Operating Temperature=80°C, Max Power Dissipation=75mW, Min Operating Temperature=-20°C, Package Quantity=1, Power Dissipation=76mW, Reverse Voltage=5V, Supplier Part Number 1=160-1647-1-ND, Case Code (Imperial)=0603, ComponentLink1Description=http://optoelectronics.liteon.com/upload/download/DS22-2000-230/LTST-C191TBKT.pdf?src-supplier=Digi-Key, ComponentLink1URL=http://optoelectronics.liteon.com/upload/download/DS22-2000-230/LTST-C191TBKT.pdf?src-supplier=Digi-Key, ComponentLink2Description=http://optoelectronics.liteon.com/upload/download/DS22-2000-230/LTST-C191TBKT.pdf?src-supplier=Verical, ComponentLink2URL=http://optoelectronics.liteon.com/upload/download/DS22-2000-230/LTST-C191TBKT.pdf?src-supplier=Verical, ComponentLink3Description=http://optoelectronics.liteon.com/upload/download/DS22-2000-230/LTST-C191TBKT.pdf?src-supplier=Mouser, ComponentLink3URL=http://optoelectronics.liteon.com/upload/download/DS22-2000-230/LTST-C191TBKT.pdf?src-supplier=Mouser, ComponentLink4Description=http://www1.futureelectronics.com/doc/LITE-ON/LTST-C191TBKT.pdf?src-supplier=Future+Electronics, ComponentLink4URL=http://www1.futureelectronics.com/doc/LITE-ON/LTST-C191TBKT.pdf?src-supplier=Future+Electronics, ComponentLink5Description=http://optoelectronics.liteon.com/upload/download/DS22-2000-230/LTST-C191TBKT.pdf?src-supplier=Jameco, ComponentLink5URL=http://optoelectronics.liteon.com/upload/download/DS22-2000-230/LTST-C191TBKT.pdf?src-supplier=Jameco, ComponentLink6Description=http://uk.rs-online.com/webdocs/0dc0/0900766b80dc02b4.pdf?src-supplier=RSComponents, ComponentLink6URL=http://uk.rs-online.com/webdocs/0dc0/0900766b80dc02b4.pdf?src-supplier=RSComponents, ComponentLink7Description=http://datasheet.iiic.cc/lite-on/LTST-C191TBKT.pdf?src-supplier=IIIC, ComponentLink7URL=http://datasheet.iiic.cc/lite-on/LTST-C191TBKT.pdf?src-supplier=IIIC, Depth=1.6mm, Dominant Wavelength=475nm, Height=0.55mm, Illumination Color=Blue, Lead Free="Lead Free", Length=0.8mm, Lens Style=Diffused,Colorless,Clear,Rectangular, Lens Transparency=Clear, Luminous Intensity=180mcd, Mount="Surface Mount", Number of Elements=1, Number of LEDs=1, Number of Pins=2, Packaging="Tape and Reel", Pricing 1="1=0.48, 10=0.342, 100=0.152, 500=0.1064, 1000=0.0874, 2500=0.076 (USD)", Radiation Hardening=No, Stock 1=239244, Supplier 1=Digi-Key, Test Current=20mA, Viewing Angle=130°, Wavelength=468nm, Width=0.8mm
P16 P25: library part "CONN HEADER TH R/A 4POS 1.5MM", "Connector Header Through Hole, Right Angle 4 position 0.059\" (1.50mm)", Color=White, Contact Resistance=30mR, Current Rating=1A, Flammability Rating="UL94 V-0", Housing Color=Beige, Insulation Color=Natural, Insulation Resistance=500MR, Manufacturer=JST, Manufacturer Part Number=S4B-ZR(LF)(SN), Max Operating Temperature=85°C, Max Voltage Rating (AC)=50V, Min Operating Temperature=-25°C, Body Plating=Tin, ComponentLink1Description=https://www.verical.com/server-webapp/html/getDatasheet?partID=763273&src-supplier=Verical, ComponentLink1URL=https://www.verical.com/server-webapp/html/getDatasheet?partID=763273&src-supplier=Verical, ComponentLink2Description=https://www.verical.com/server-webapp/html/getDatasheet?partID=640380&src-supplier=Verical, ComponentLink2URL=https://www.verical.com/server-webapp/html/getDatasheet?partID=640380&src-supplier=Verical, ComponentLink3Description=http://www1.futureelectronics.com/doc/JST/S4B-ZR(LF)(SN).pdf?src-supplier=Future+Electronics, ComponentLink3URL=http://www1.futureelectronics.com/doc/JST/S4B-ZR(LF)(SN).pdf?src-supplier=Future+Electronics, ComponentLink4Description=http://www.jst-mfg.com/product/pdf/eng/eZH.pdf?src-supplier=Digi-Key, ComponentLink4URL=http://www.jst-mfg.com/product/pdf/eng/eZH.pdf?src-supplier=Digi-Key, ComponentLink5Description=http://www.farnell.com/datasheets/80556.pdf?src-supplier=Element14, ComponentLink5URL=http://www.farnell.com/datasheets/80556.pdf?src-supplier=Element14, ComponentLink6Description=https://www.verical.com/server-webapp/html/getDatasheet?partID=703398&src-supplier=Verical, ComponentLink6URL=https://www.verical.com/server-webapp/html/getDatasheet?partID=703398&src-supplier=Verical, Connector Type="Header,Male Pin", Contact Material=Brass,Tin,Copper, Contact Mating Length=0.094inch, Contact Plating=Tin,Copper, Contact Shape=Circular, Depth=6mm, Fastening Type=Detent, Gender=Male, Height=7.2mm, Housing Material=Polyamide, Insulation Material=Nylon, Lead Free="Lead Free", Lead Pitch=1.5mm, Length=7.5mm, Material=Nylon, Max Current Rating=1A, Max Voltage Rating (DC)=50V, Mount="Through Hole", Number of Contacts=4, Number of Pins=4, Number of Positions=4, Number of Rows=1, Orientation="Right Angle", Packaging=Bulk, Panel Thickness=3.5mm, Pitch=1.5mm, REACH SVHC="No SVHC", Stock 1=0, Supplier 1=Arrow, Supplier Part Number 1=S4B-ZR(LF)(SN), Termination=Solder, Voltage Rating=50V, Voltage Rating (AC)=50V, Voltage Rating (DC)=50V, Width=3.5mm
  P16: pin_1=GND, pin_2=+VDC, pin_3=SENSE, pin_4=CTRL
  P25: pin_1=B+, pin_2=B-, pin_3=A-, pin_4=A+
P18: library part "CONN HEADER TH R/A 3POS 1.5MM", "Connector Header Through Hole, Right Angle 3 position 0.059\" (1.50mm)", Color=Natural,White, Contact Resistance=30mR, Current Rating=1A, Flammability Rating="UL94 V-0", Housing Color=Beige, Insulation Resistance=500MR, Manufacturer=JST, Manufacturer Part Number=S3B-ZR(LF)(SN), Max Operating Temperature=85°C, Max Voltage Rating (AC)=50V, Min Operating Temperature=-25°C, Supplier Part Number 1=455-1670-ND, Body Plating=Tin, ComponentLink1Description=http://www.jst-mfg.com/product/pdf/eng/eZH.pdf?src-supplier=Digi-Key, ComponentLink1URL=http://www.jst-mfg.com/product/pdf/eng/eZH.pdf?src-supplier=Digi-Key, ComponentLink2Description=https://www.verical.com/server-webapp/html/getDatasheet?partID=722697&src-supplier=Verical, ComponentLink2URL=https://www.verical.com/server-webapp/html/getDatasheet?partID=722697&src-supplier=Verical, ComponentLink3Description=http://www.produktinfo.conrad.com/datenblaetter/725000-749999/741155-da-01-en-STIFTLEISTE_GEWINKELT_3_POL_RM1_5.pdf?src-supplier=Conrad, ComponentLink3URL=http://www.produktinfo.conrad.com/datenblaetter/725000-749999/741155-da-01-en-STIFTLEISTE_GEWINKELT_3_POL_RM1_5.pdf?src-supplier=Conrad, Connector Type="Male Pin", Contact Material=Brass,Copper,Tin, Contact Mating Length=0.094inch, Contact Plating=Tin,Copper, Depth=6mm, Fastening Type=Detent, Gender=Male, Height=7.2mm, Housing Material=Polyamide, Lead Free="Lead Free", Lead Pitch=1.5mm, Length=6mm, Material=Nylon, Max Current Rating=1A, Mount="Through Hole", Number of Contacts=3, Number of Pins=3, Number of Positions=3, Number of Rows=1, Orientation="Right Angle", Packaging=Bulk, Panel Thickness=3.5mm, pin_1=BATT+, pin_2=VSENS, pin_3=BATT-, Pitch=1.5mm, Pricing 1="1=0.2, 10=0.184, 100=0.1274, 500=0.1078, 1000=0.0882, 5000=0.0784, 10000=0.071 (USD)", REACH SVHC="No SVHC", Stock 1=0, Supplier 1=Digi-Key, Termination=Press-Fit, Voltage Rating=50V, Voltage Rating (AC)=50V, Voltage Rating (DC)=50V, Width=3.5mm
P19: "NTC Thermistor 10k 0603 (1608 Metric)", Case/Package=0603, Case Code (Metric)=1608, Manufacturer=Panasonic, Manufacturer Part Number=ERT-J1VG103JA, Max Operating Temperature=125°C, Max Power Dissipation=100mW, Min Operating Temperature=-40°C, Package Quantity=4000, Resistance=10kR, Supplier Part Number 1=P12014CT-ND, Tolerance=5%, Accuracy=1%, Case Code (Imperial)=0603, ComponentLink1Description=http://www.farnell.com/datasheets/2085569.pdf?src-supplier=Farnell, ComponentLink1URL=http://www.farnell.com/datasheets/2085569.pdf?src-supplier=Farnell, ComponentLink2Description=http://www.farnell.com/datasheets/1314428.pdf?src-supplier=Element14, ComponentLink2URL=http://www.farnell.com/datasheets/1314428.pdf?src-supplier=Element14, ComponentLink3Description=https://industrial.panasonic.com/cdbs/www-data/pdf/AUA0000/AUA0000COL16.pdf?src-supplier=Digi-Key, ComponentLink3URL=https://industrial.panasonic.com/cdbs/www-data/pdf/AUA0000/AUA0000COL16.pdf?src-supplier=Digi-Key, ComponentLink4Description=http://industrial.panasonic.com/www-data/pdf/AUA0000/AUA0000CE1.pdf?src-supplier=Future+Electronics, ComponentLink4URL=http://industrial.panasonic.com/www-data/pdf/AUA0000/AUA0000CE1.pdf?src-supplier=Future+Electronics, ComponentLink5Description=https://industrial.panasonic.com/www-data/pdf/AUA0000/AUA0000CE1.pdf?src-supplier=Avnet, ComponentLink5URL=https://industrial.panasonic.com/www-data/pdf/AUA0000/AUA0000CE1.pdf?src-supplier=Avnet, Depth=0.8mm, Lead Free="Lead Free", Length=1.6mm, Mount="Surface Mount", Number of Pins=2, Packaging="Tape and Reel", Pricing 1="1=0.15, 5=0.146, 10=0.13, 25=0.12, 50=0.096, 100=0.0824, 500=0.0721, 1000=0.0618 (USD)", Radiation Hardening=No, REACH SVHC="No SVHC", Stock 1=28072, Supplier 1=Digi-Key, Termination=SMD/SMT, Width=800um
P19.1 X4: library part "CONN HEADER TH R/A 2POS 1.5MM", "Connector Header Through Hole, Right Angle 2 position 0.059\" (1.50mm)", Color=Natural,White, Contact Resistance=30mR, Current Rating=1A, Flammability Rating="UL94 V-0", Housing Color=Beige, Insulation Resistance=500MR, Manufacturer=JST, Manufacturer Part Number=S2B-ZR(LF)(SN), Max Operating Temperature=85°C, Max Voltage Rating (AC)=50V, Min Operating Temperature=-25°C, Supplier Part Number 1=455-1669-ND, Body Plating=Tin, ComponentLink1Description=http://www.farnell.com/datasheets/80556.pdf?src-supplier=Element14, ComponentLink1URL=http://www.farnell.com/datasheets/80556.pdf?src-supplier=Element14, ComponentLink2Description=http://www1.futureelectronics.com/doc/JST/S2B-ZR(LF)(SN).pdf?src-supplier=Future+Electronics, ComponentLink2URL=http://www1.futureelectronics.com/doc/JST/S2B-ZR(LF)(SN).pdf?src-supplier=Future+Electronics, ComponentLink3Description=http://www.jst-mfg.com/product/pdf/eng/eZH.pdf?src-supplier=Digi-Key, ComponentLink3URL=http://www.jst-mfg.com/product/pdf/eng/eZH.pdf?src-supplier=Digi-Key, ComponentLink4Description=https://www.verical.com/server-webapp/html/getDatasheet?partID=687340&src-supplier=Verical, ComponentLink4URL=https://www.verical.com/server-webapp/html/getDatasheet?partID=687340&src-supplier=Verical, Connector Type="Male Pin", Contact Material=Brass,Tin,Copper, Contact Mating Length=0.094inch, Contact Plating=Tin,Copper, Depth=6mm, Fastening Type=Detent, Gender=Male, Height=7.2mm, Housing Material=Polyamide, Lead Free="Lead Free", Lead Pitch=1.5mm, Length=4.5mm, Material=Nylon, Max Current Rating=1A, Mount="Through Hole", Number of Contacts=2, Number of Pins=2, Number of Positions=2, Number of Rows=1, Orientation="Right Angle", Packaging=Bulk, Panel Thickness=3.5mm, Pitch=1.5mm, Pricing 1="1=0.19, 10=0.177, 100=0.109, 500=0.0902, 1000=0.079, 5000=0.0677, 10000=0.0658 (USD)", REACH SVHC="No SVHC", Stock 1=14685, Supplier 1=Digi-Key, Termination=Press-Fit, Voltage Rating=50V, Voltage Rating (AC)=50V, Voltage Rating (DC)=50V, Width=3.5mm
  P19.1: pin_1=NTC+, pin_2=NTC-
  X4: pin_1=TAMP+, pin_2=TAMP-
P20 P28: library part "CONN FFC FPC TOP 5POS 0.50MM R/A", "5 Position FFC, FPC Connector Contacts, Top 0.020\" (0.50mm) Surface Mount, Right Angle", Contact Resistance=40mR, Current Rating=500mA, Flammability Rating="UL94 V-0", Manufacturer=Molex, Manufacturer Part Number=0545500571, Max Operating Temperature=85°C, Min Operating Temperature=-20°C, Package Quantity=1, Supplier Part Number 1=WM8824CT-ND, Voltage Rating=50V, Actuator Material=Polyphenylene, ComponentLink1Description=http://www.molex.com/webdocs/datasheets/pdf/en-us/0545500571_FFC_FPC_CONNECTORS.pdf?src-supplier=Avnet, ComponentLink1URL=http://www.molex.com/webdocs/datasheets/pdf/en-us/0545500571_FFC_FPC_CONNECTORS.pdf?src-supplier=Avnet, Contact Material=Bronze, Contact Plating=Gold, Depth=5mm, Housing Material=Polymer, Length=7.7mm, Mount="Surface Mount", Number of Positions=5, Number of Rows=1, Orientation="Right Angle", Packaging="Tape and Reel", pin_1=SCL, pin_2=SDA, pin_3=VDD, pin_4=GPIO, pin_5=GND, Pitch=0.02inch, Pricing 1="1=0.98, 10=0.808, 100=0.673, 1000=0.5384 (USD)", Radiation Hardening=No, Stock 1=20865, Supplier 1=Digi-Key, Termination=Solder, Wire/Cable Type=Straight
P22: library part "CONN HEADER TH R/A 5POS 1.5MM", "Connector Header Through Hole, Right Angle 5 position 0.059\" (1.50mm)", Color=Natural, Contact Resistance=30mR, Current Rating=1A, Housing Color=Beige, Manufacturer=JST, Manufacturer Part Number=S5B-ZR(LF)(SN), Max Operating Temperature=85°C, Max Voltage Rating (AC)=50V, Min Operating Temperature=-25°C, Supplier Part Number 1=455-1672-ND, 7BIT_ADDR=0x52, ComponentLink1Description=http://www.jst-mfg.com/product/pdf/eng/eZH.pdf?src-supplier=Digi-Key, ComponentLink1URL=http://www.jst-mfg.com/product/pdf/eng/eZH.pdf?src-supplier=Digi-Key, ComponentLink2Description=https://www.verical.com/server-webapp/html/getDatasheet?partID=640593&src-supplier=Verical, ComponentLink2URL=https://www.verical.com/server-webapp/html/getDatasheet?partID=640593&src-supplier=Verical, ComponentLink3Description=http://www1.futureelectronics.com/doc/JST/S5B-ZR(LF)(SN).pdf?src-supplier=Future+Electronics, ComponentLink3URL=http://www1.futureelectronics.com/doc/JST/S5B-ZR(LF)(SN).pdf?src-supplier=Future+Electronics, ComponentLink4Description=http://www.produktinfo.conrad.com/datenblaetter/725000-749999/741204-da-01-en-STIFTLEISTE_GEWINKELT_5_POL_RM1_5.pdf?src-supplier=Conrad, ComponentLink4URL=http://www.produktinfo.conrad.com/datenblaetter/725000-749999/741204-da-01-en-STIFTLEISTE_GEWINKELT_5_POL_RM1_5.pdf?src-supplier=Conrad, Connector Type="Male Pin", Contact Material=Brass,Tin, Contact Mating Length=0.094inch, Contact Plating=Tin,Copper, Depth=6mm, Fastening Type=Detent, Gender=Male, Height=7.2mm, Housing Material=Polyamide, Lead Free="Lead Free", Length=9mm, Max Current Rating=1A, Mount="Through Hole", Number of Contacts=5, Number of Pins=5, Number of Positions=5, Number of Rows=1, Orientation="Right Angle", Packaging=Bulk, pin_1=SCL, pin_2=SDA, pin_3=VDD, pin_4=DIR, pin_5=GND, Pitch=1.5mm, Pricing 1="1=0.29, 10=0.272, 100=0.1889, 500=0.1598, 1000=0.1308, 5000=0.1162, 10000=0.1053 (USD)", Stock 1=41138, Supplier 1=Digi-Key, Termination=Press-Fit, Voltage Rating=50V, Width=3.5mm